# EAGLE board Magazine Reloader (EAGLE 7.6.0)
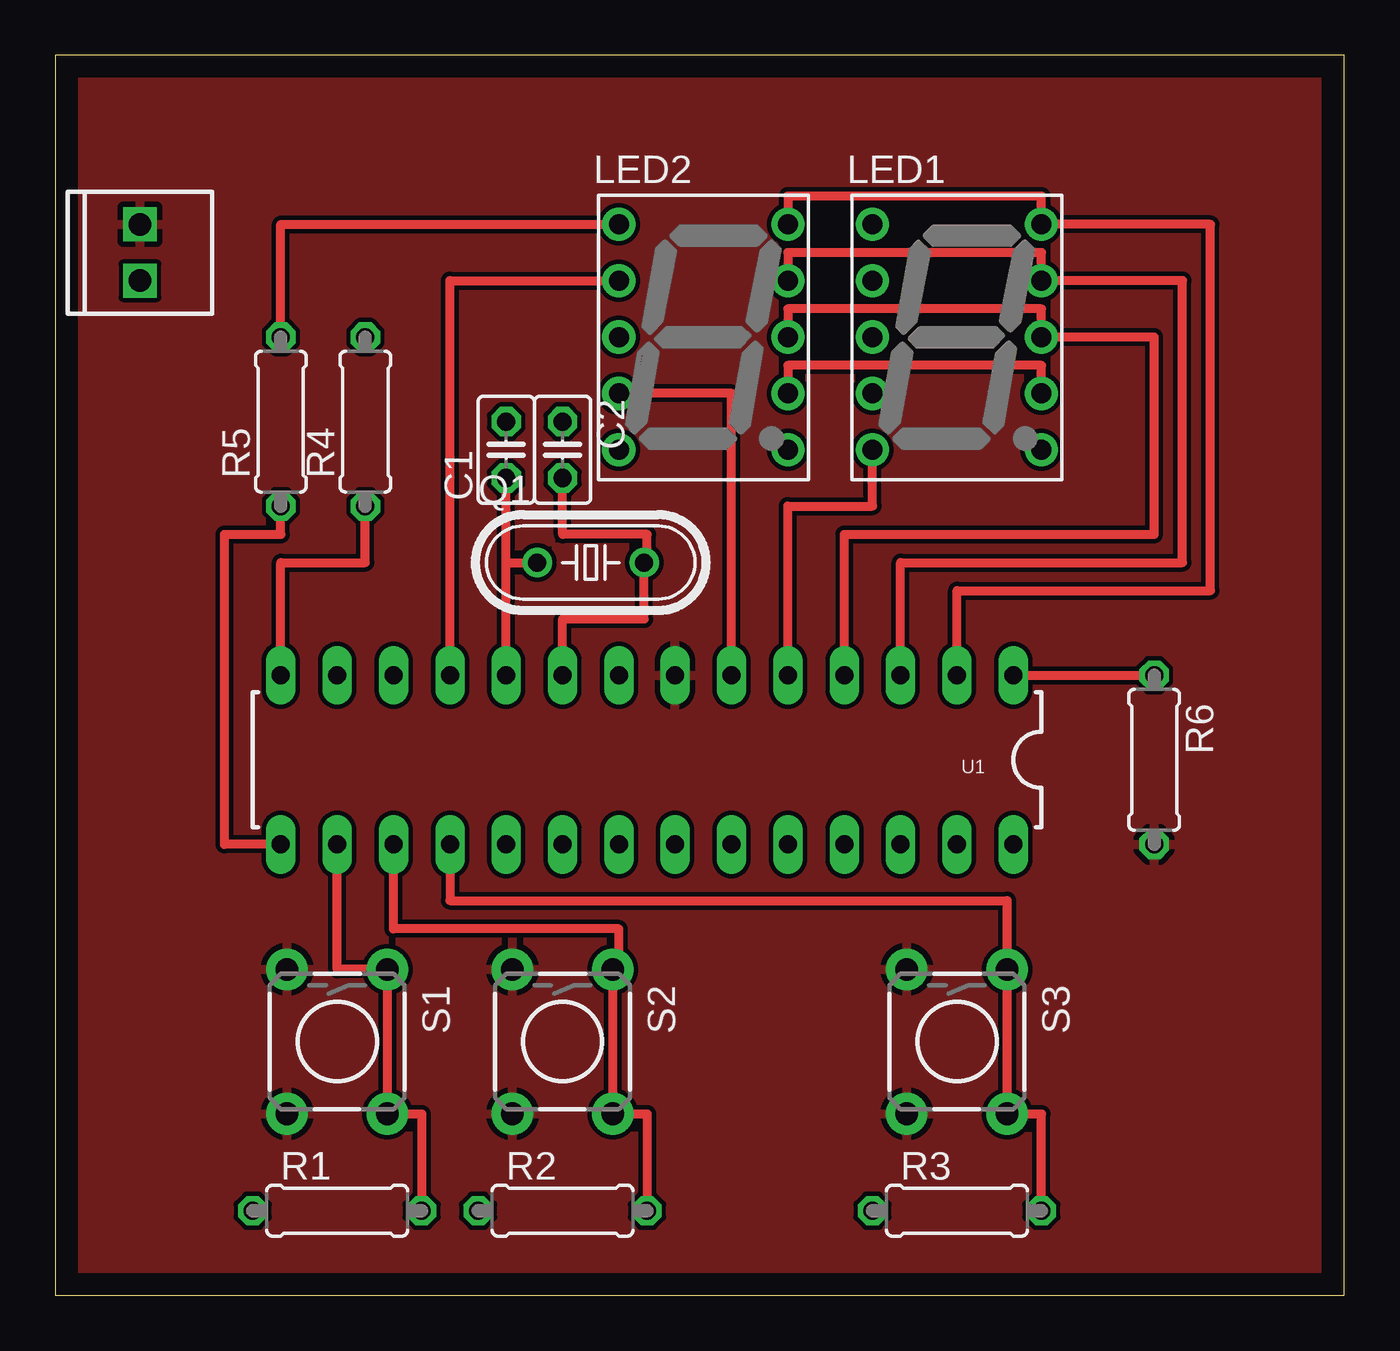
[diagram p0: board, top side]
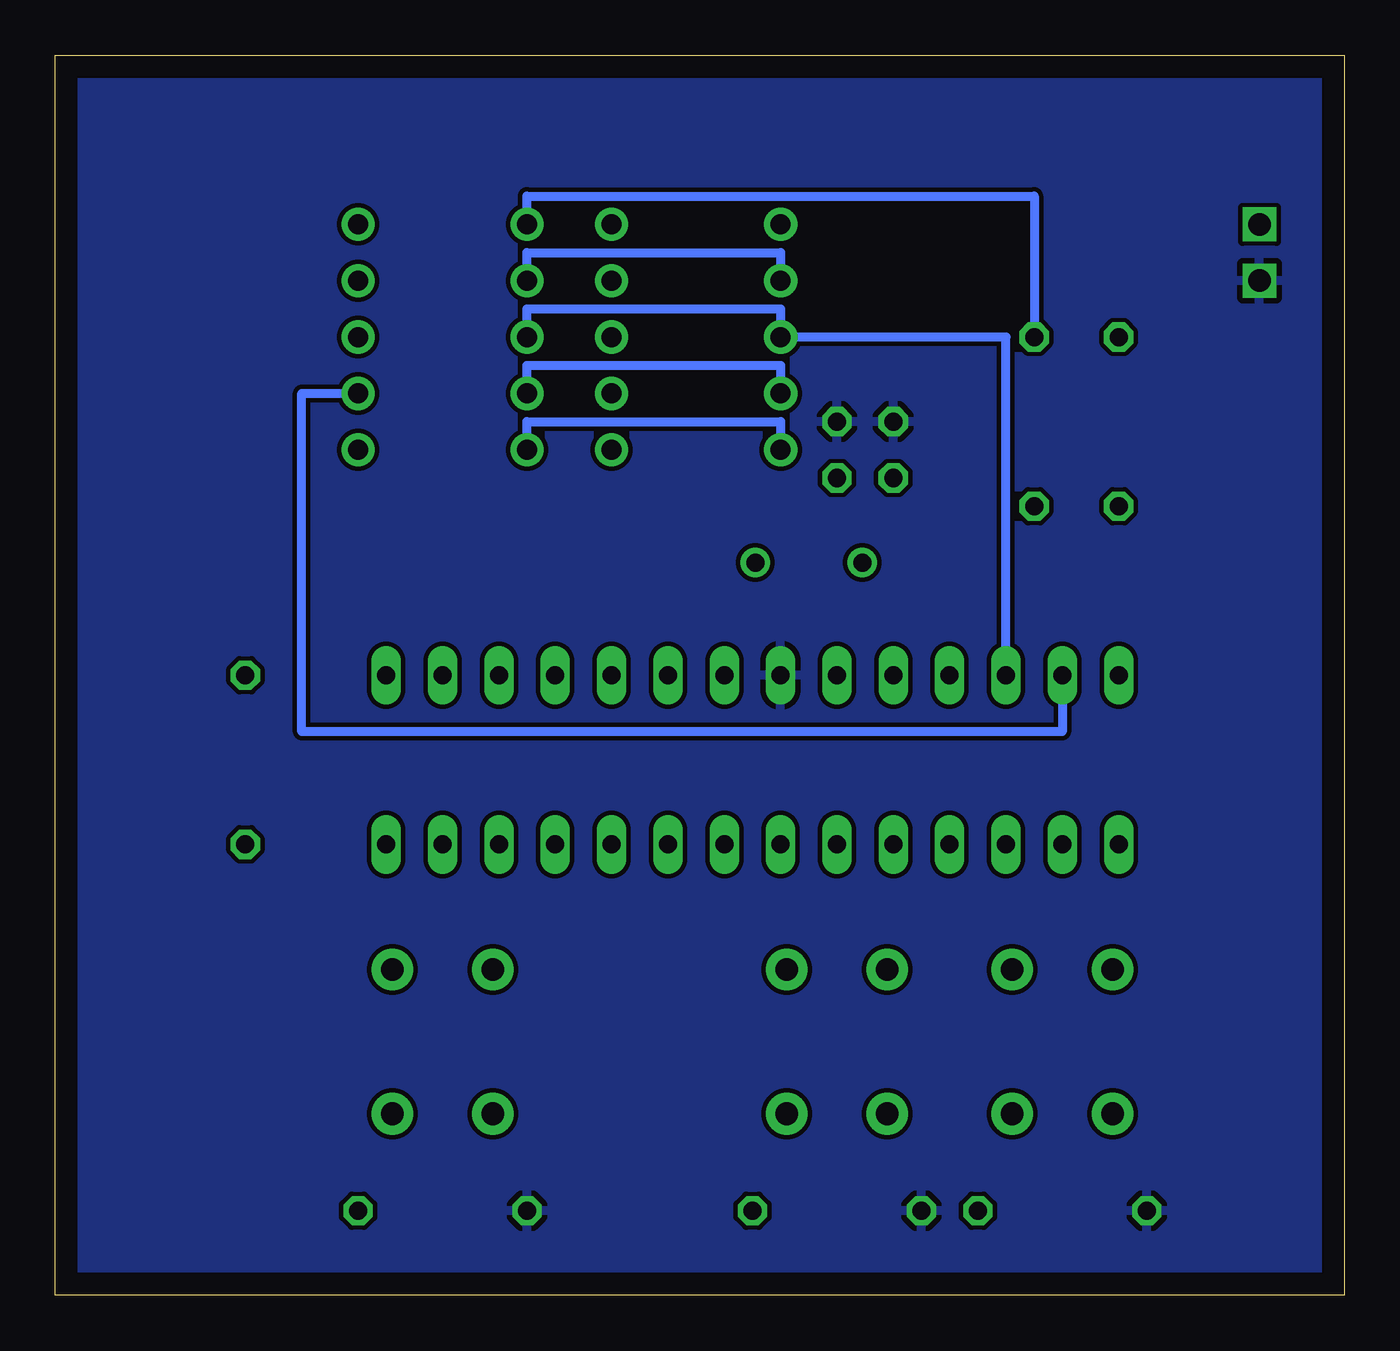
[diagram p1: board, bottom side, seen from below]

Size 58.09 x 55.87 mm. Coordinates in mm from the lower left corner, seen from the top.
Outline: 0,0 58.09,0 58.09,55.87 0,55.87 0,0
Copper layers (1*16): Top 0.035mm / dielectric 1.5mm / Bottom 0.035mm
Design rules "default": minimum track width 10mil, minimum drill 24mil, track to track 8mil, track to pad 8mil, pad to pad 8mil, via to via 8mil, smd to smd 8mil, copper to edge 40mil, drill to drill 8mil, minimum pad ring 10mil, minimum via ring 8mil, stop-mask expansion 4mil, vias tented up to drill 0mil, thermal gap 10mil

## Footprints (pad centres in the part's own frame; a part is rotated, then mirrored left to right if it is on the bottom)
C025-025X050 = drill 0.813 octagon: 1 -1.27,0; 2 1.27,0
1X02_2.54_SCREWTERM = drill 1.016 square: P1 2.54,0; P2 0,0
LA-401 = drill 0.9 pad 1.5: 1 -3.81,5.08; 2 -3.81,2.54; 3 -3.81,0; 4 -3.81,-2.54; 5 -3.81,-5.08; 6 3.81,-5.08; 7 3.81,-2.54; 8 3.81,0; 9 3.81,2.54; 10 3.81,5.08
HC49/S = drill 0.813: 1 -2.413,0; 2 2.413,0
0207/7 = drill 0.813 octagon: 1 -3.81,0; 2 3.81,0
TACTILE-PTH = drill 1.016 pad 1.88: 1 -3.251,2.261; 2 3.251,2.261; 3 -3.251,-2.261; 4 3.251,-2.261
DIL28-3 = drill 0.813 long: 1 -16.51,-3.81; 2 -13.97,-3.81; 3 -11.43,-3.81; 4 -8.89,-3.81; 5 -6.35,-3.81; 6 -3.81,-3.81; 7 -1.27,-3.81; 8 1.27,-3.81; 9 3.81,-3.81; 10 6.35,-3.81; 11 8.89,-3.81; 12 11.43,-3.81; 13 13.97,-3.81; 14 16.51,-3.81; 15 16.51,3.81; 16 13.97,3.81; 17 11.43,3.81; 18 8.89,3.81; 19 6.35,3.81; 20 3.81,3.81; 21 1.27,3.81; 22 -1.27,3.81; 23 -3.81,3.81; 24 -6.35,3.81; 25 -8.89,3.81; 26 -11.43,3.81; 27 -13.97,3.81; 28 -16.51,3.81

## Placement (x,y rotation side)
C1  [C025-025X050]  20.32,38.1 90 top
C2  [C025-025X050]  22.86,38.1 270 top
J1  [1X02_2.54_SCREWTERM]  3.81,45.72 90 top
LED1  LA-401AD  [LA-401]  40.64,43.18 0 top
LED2  LA-401AD  [LA-401]  29.21,43.18 0 top
Q1  [HC49/S]  24.13,33.02 0 top
R1  [0207/7]  12.7,3.81 0 top
R2  [0207/7]  22.86,3.81 0 top
R3  [0207/7]  40.64,3.81 0 top
R4  [0207/7]  13.97,39.37 90 top
R5  [0207/7]  10.16,39.37 90 top
R6  [0207/7]  49.53,24.13 270 top
S1  [TACTILE-PTH]  12.7,11.43 270 top
S2  [TACTILE-PTH]  22.86,11.43 270 top
S3  [TACTILE-PTH]  40.64,11.43 270 top
U1  ATMEGA328P_PDIP  [DIL28-3]  26.67,24.13 180 top

## Library data of the parts
C1 C2 R1-R6 = resistor
J1 = SparkFun-Connectors
LED1 LED2 = led-7-segment; OC_FARNELL: unknown; OC_NEWARK: unknown
Q1 = crystal; OC_FARNELL: 1667008; OC_NEWARK: unknown
S1-S3 = SparkFun-Retired
U1 = SparkFun-DigitalIC

## Nets
GND: C1.2 C2.1 J1.P2 R1.1 R2.1 R3.1 U1.8
N$1: LED1.3 LED2.3 U1.12
N$2: LED1.2 LED2.2 U1.11
N$3: LED1.4 LED2.4 U1.6
N$4: LED1.5 LED2.5 U1.5
N$5: LED1.8 LED2.8 U1.4
N$6: LED1.9 LED2.9 U1.3
N$7: LED1.10 LED2.10 U1.2
N$8: LED1.7 LED2.7 U1.13
N$9: R4.1 U1.14
N$10: R5.1 U1.15
N$11: LED1.1 R4.2
N$12: LED2.1 R5.2
N$13: R3.2 S3.1 S3.2 U1.18
N$14: R2.2 S2.1 S2.2 U1.17
N$15: R1.2 S1.1 S1.2 U1.16
N$16: C2.2 Q1.2 U1.9
N$17: C1.1 Q1.1 U1.10
N$18: R6.1 U1.1
VCC: J1.P1 R6.2 S1.3 S1.4 S2.3 S2.4 S3.3 S3.4 U1.7

## Tracks (layer width: path | path; a pad name or v marks a point on that pad's centre or on a via)
GND
  pour Bottom: 0,55.88 58.42,55.88 58.42,0 0,0
N$1
  Bottom 0.406: LED1.3 36.83,44.45 25.4,44.45 LED2.3 15.24,43.18 U1.12
N$2
  Top 0.406: U1.11 17.78,45.72 LED2.2
  Bottom 0.406: LED1.2 36.83,46.99 25.4,46.99 LED2.2
N$3
  Top 0.406: U1.6 30.48,40.64 LED2.4
  Bottom 0.406: LED1.4 36.83,41.91 25.4,41.91 LED2.4
N$4
  Top 0.406: U1.5 33.02,35.56 36.83,35.56 LED1.5
  Bottom 0.406: LED1.5 36.83,39.37 25.4,39.37 LED2.5
N$5
  Top 0.406: LED2.8 33.02,44.45 44.45,44.45 LED1.8 49.53,43.18 49.53,34.29 35.56,34.29 U1.4
N$6
  Top 0.406: LED2.9 33.02,46.99 44.45,46.99 LED1.9 50.8,45.72 50.8,33.02 38.1,33.02 U1.3
N$7
  Top 0.406: LED2.10 33.02,49.53 44.45,49.53 LED1.10 52.07,48.26 52.07,31.75 40.64,31.75 U1.2
N$8
  Top 0.406: LED1.7 44.45,41.91 33.02,41.91 LED2.7
  Bottom 0.406: U1.13 12.7,25.4 46.99,25.4 46.99,40.64 LED1.7
N$9
  Top 0.406: U1.14 10.16,33.02 13.97,33.02 R4.1
N$10
  Top 0.406: U1.15 7.62,20.32 7.62,34.29 10.16,34.29 R5.1
N$11
  Bottom 0.406: LED1.1 36.83,49.53 13.97,49.53 R4.2
N$12
  Top 0.406: R5.2 10.16,48.26 LED2.1
N$13
  Top 0.406: U1.18 17.78,17.78 42.9,17.78 S3.1 S3.2 44.45,8.18 R3.2
N$14
  Top 0.406: U1.17 15.24,16.51 25.4,16.51 25.4,14.68 S2.1 S2.2 26.67,8.18 R2.2
N$15
  Top 0.406: U1.16 12.7,14.68 S1.1 S1.2 16.51,8.18 R1.2
N$16
  Top 0.406: U1.9 22.86,30.48 26.54,30.48 Q1.2 26.67,33.02 26.67,34.29 22.86,34.29 C2.2
N$17
  Top 0.406: U1.10 20.32,33.02 | 20.32,33.02 Q1.1 | 20.32,33.02 C1.1
N$18
  Top 0.406: U1.1 R6.1
VCC
  pour Top: 0,55.88 58.42,55.88 58.42,0 0,0